# Altium PCB NZS_A4954_Rx.PcbDoc (part 1 of 2)
Units mil, origin at the board's own origin, x right, y up, seen from the top; angles counter-clockwise.
Board outline 1653.54 x 1653.54 mil, 2 copper layers (Top Layer, Bottom Layer), stack 61.2 mil thick; 79 components, 75 nets, 289 pads, 145 vias.
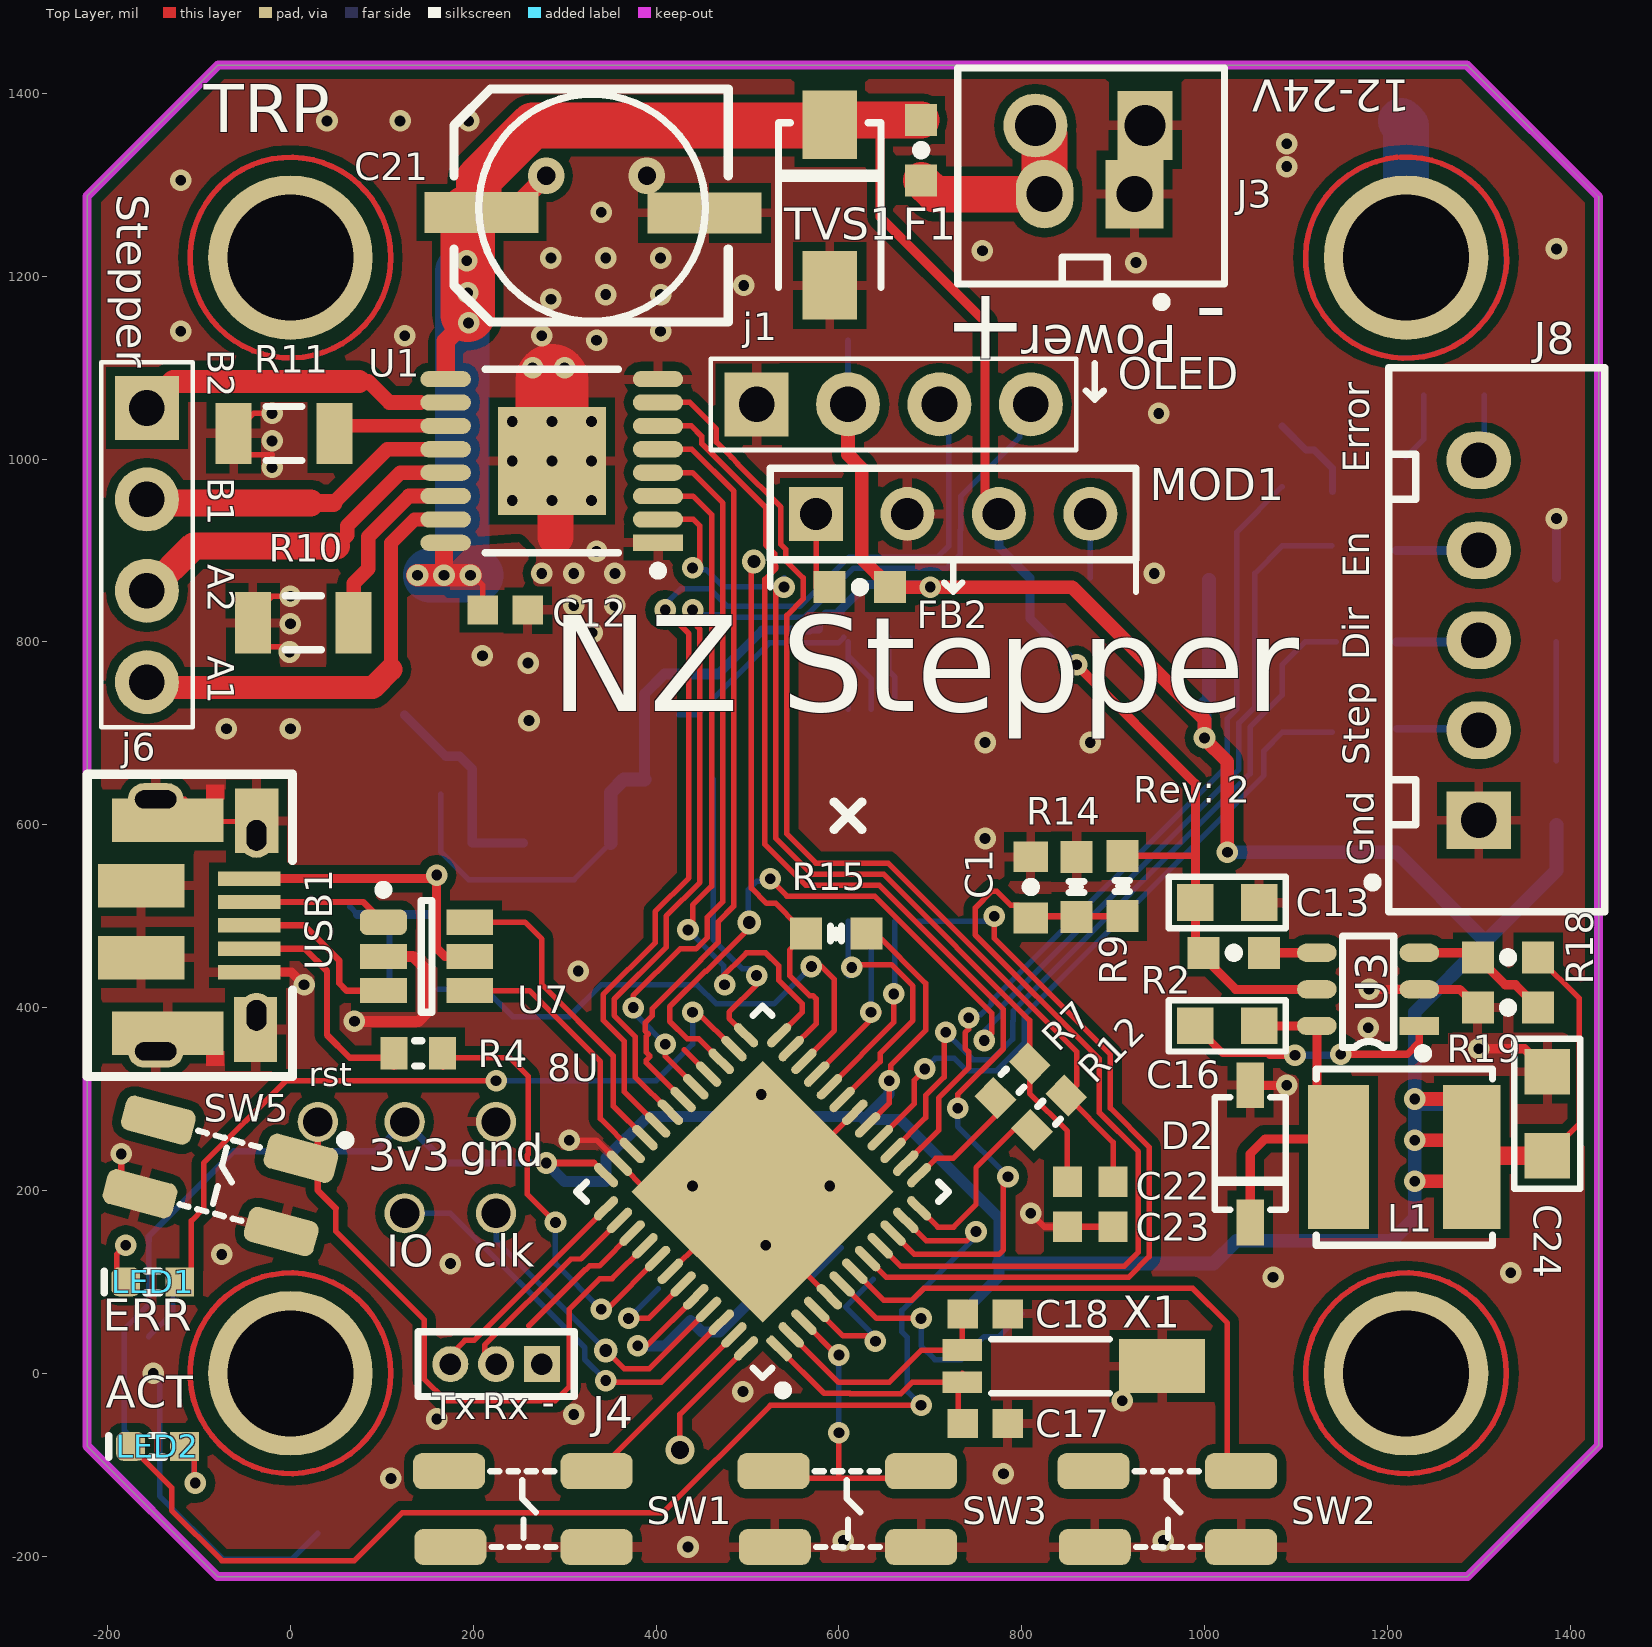
[diagram p0: Top Layer view]
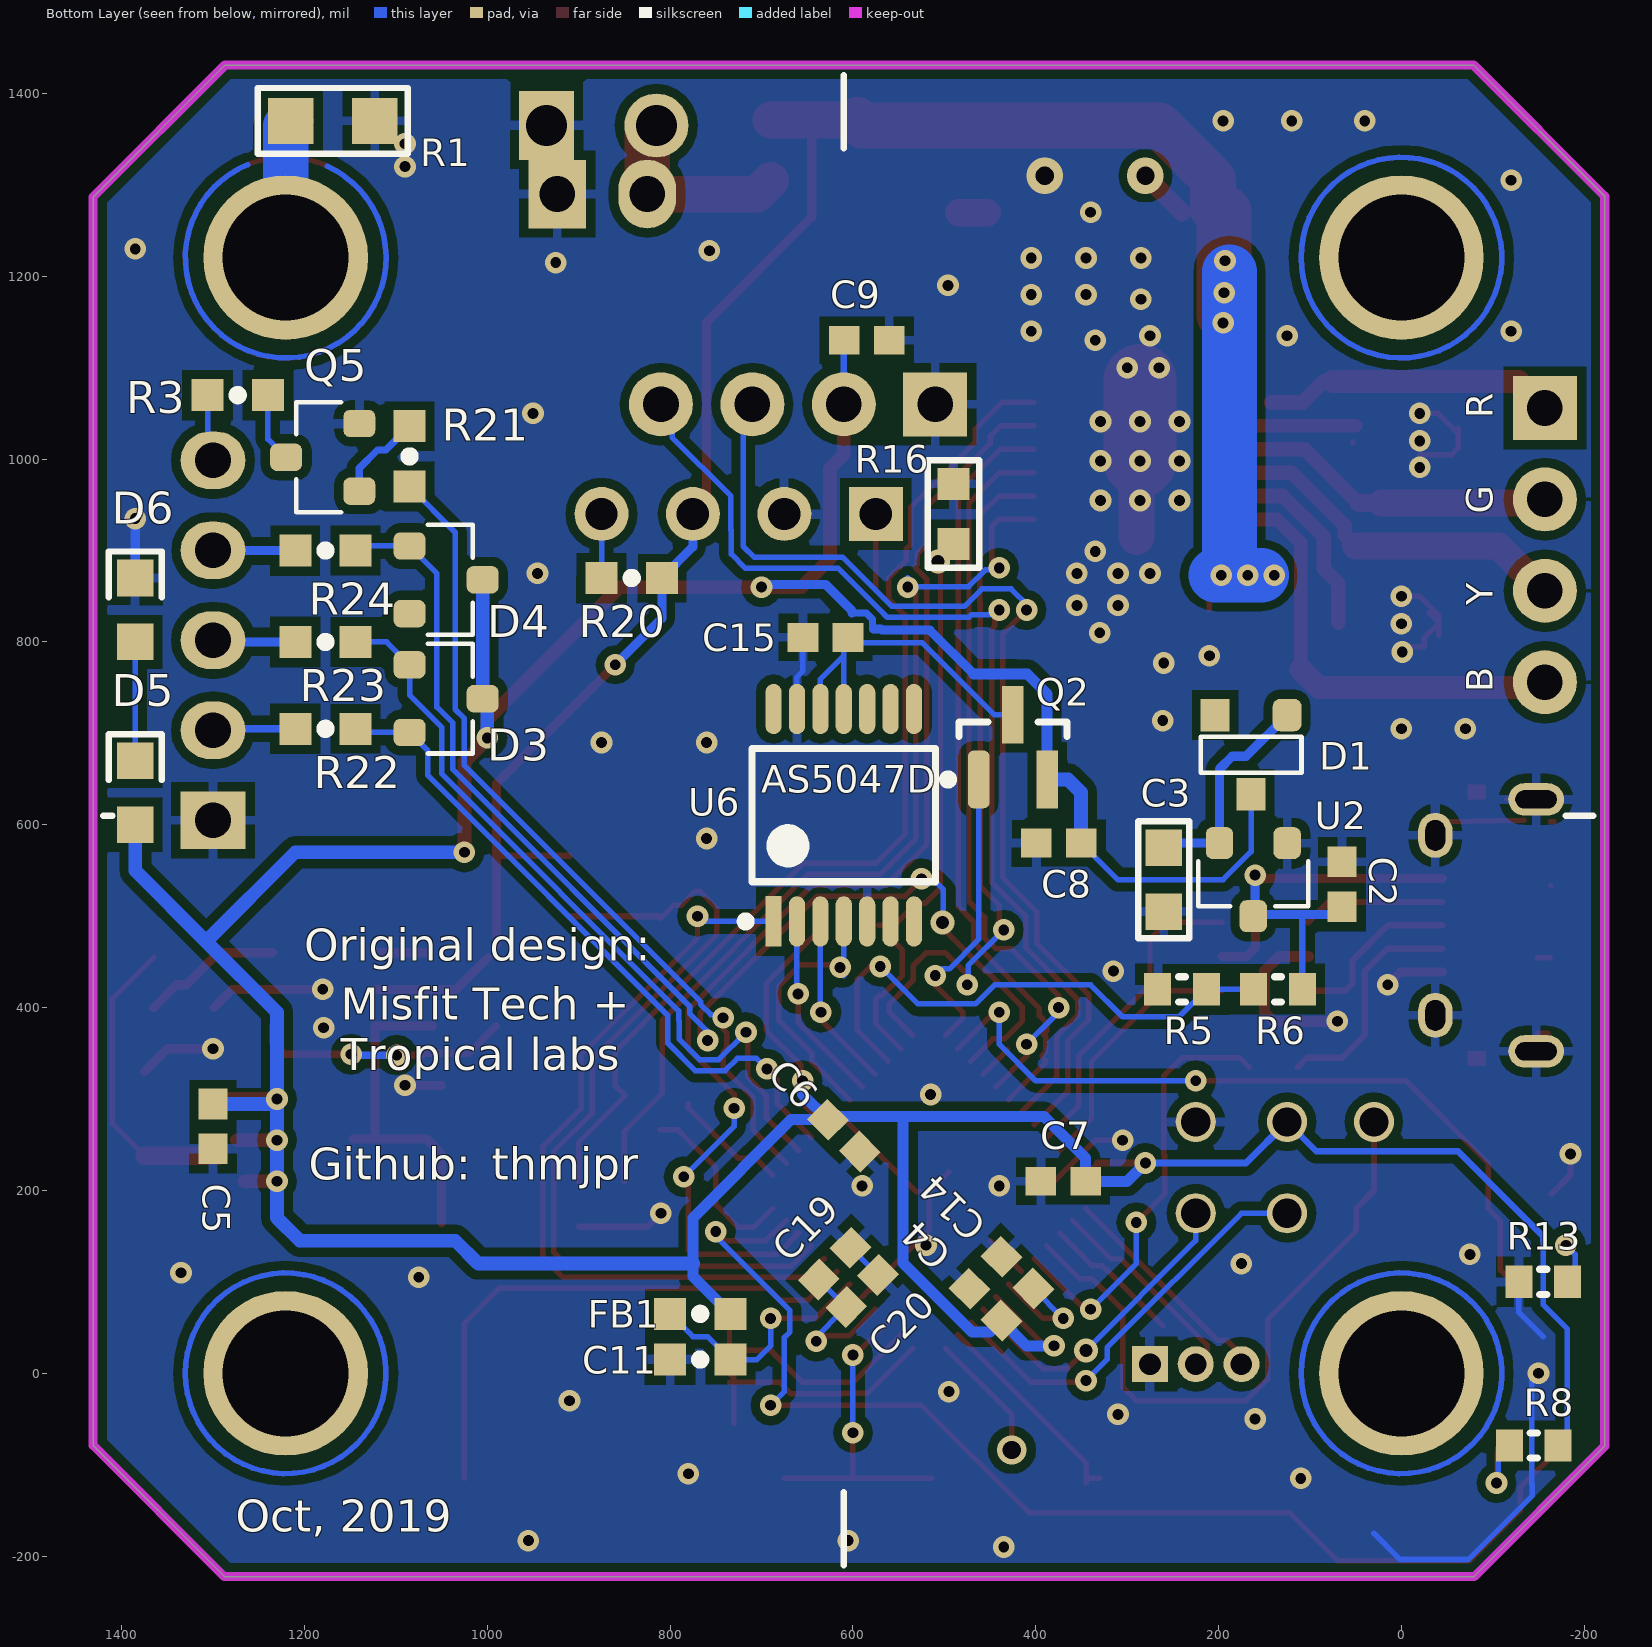
[diagram p1: Bottom Layer view, seen from below]
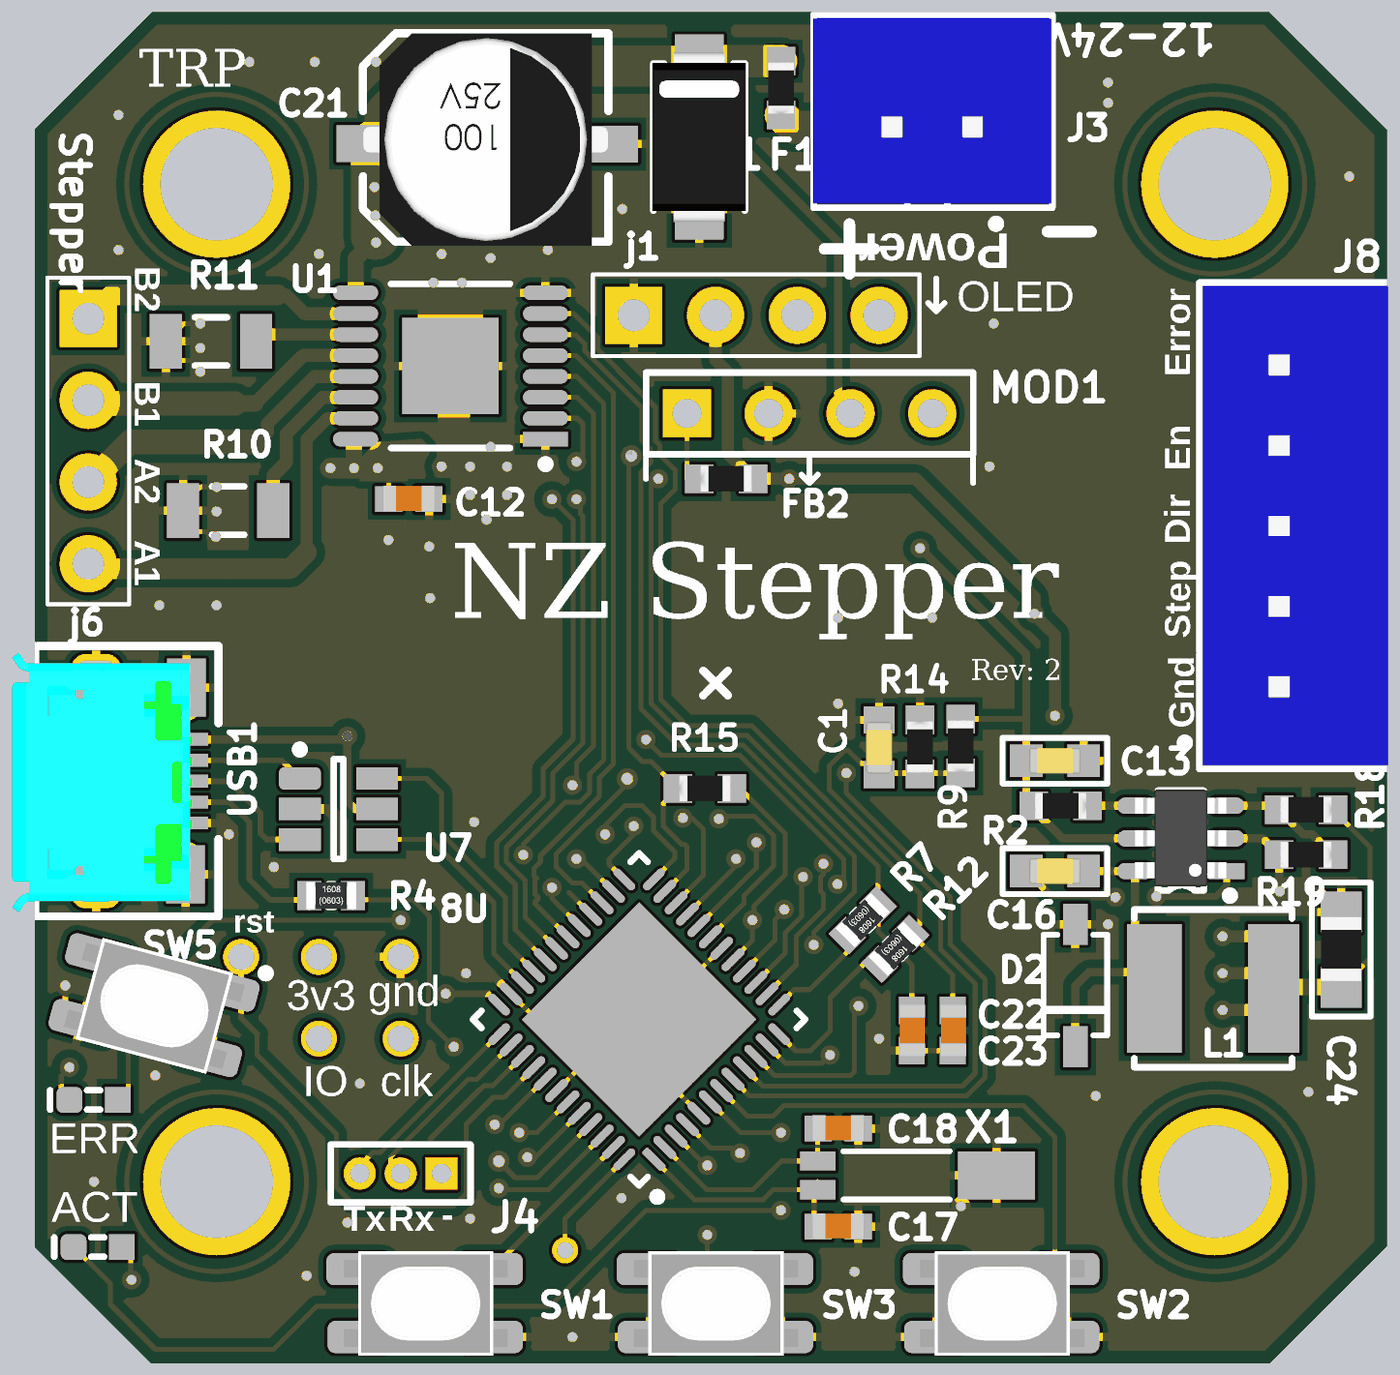
[diagram p2: 3D render of the assembled board from above, using the file's embedded part models]
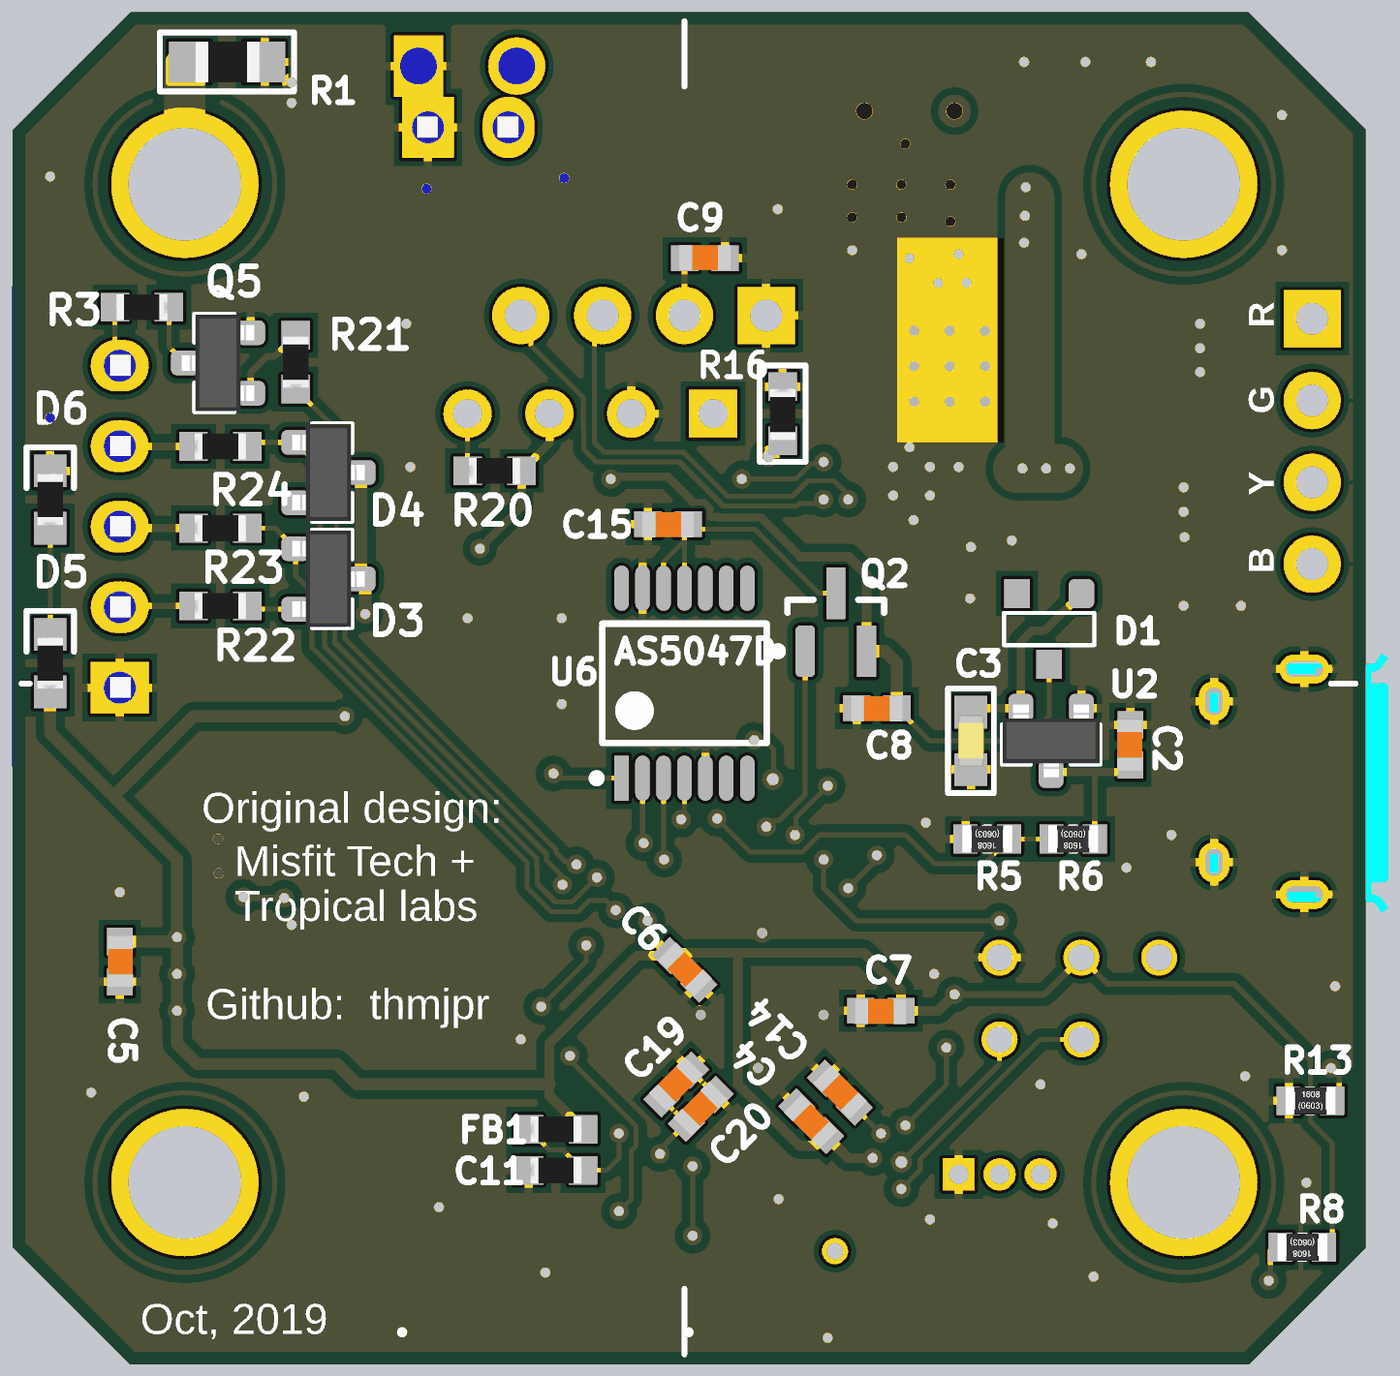
[diagram p3: 3D render of the assembled board from below, using the file's embedded part models]

## Layer stack, top to bottom
Top Solder: solder mask 0.4, Solder Resist, Dk 3.5
Top Layer: signal copper 1.4
Dielectric 1: dielectric 58.4, FR-4, Dk 4.8
Bottom Layer: signal copper 1.4
Bottom Solder: solder mask 0.4, Solder Resist, Dk 3.5

## Board outline
-79.56,-222.44 -222.44,-79.56 -222.44,1287.56 -78.9,1431.1 1286.9,1431.1 1431.1,1286.9 1431.1,-78.9 1287.56,-222.44

## Design rules (kind name [scope] priority, off if disabled: settings)
Clearance Vmotor [InNet('VMOT')] p1: gap=9 ignorepadtopadclearanceinfootprint=TRUE
Clearance poly [InPolygon] p2: gap=10 ignorepadtopadclearanceinfootprint=FALSE
Clearance [All] p3: gap=6 ignorepadtopadclearanceinfootprint=FALSE except(0: Arc-Hole Track-Hole SMDPad-Hole THPad-Hole Via-Hole Fill-Hole Poly-Hole Region-Hole Text-Hole)
HoleSize [All] p1: absolutevalues=TRUE maxlimit=393.7 minlimit=11.81 maxpercent=80.000 minpercent=20.000
MinimumAnnularRing [All] p1: minimumring=5.91
MinimumSolderMaskSliver [All] p1: minsoldermaskwidth=1
PolygonConnect isvia [isvia] p1: connectstyle=Direct reliefconductorwidth=10 reliefentries=4 polygonreliefangle="90 Angle" airgapwidth=10
PolygonConnect PolygonConnect_4 [All vs IsNamedPolygon('vmot')] p2: connectstyle=Direct reliefconductorwidth=10 reliefentries=4 polygonreliefangle="90 Angle" airgapwidth=10
PolygonConnect PolygonConnect_2 [All vs IsNamedPolygon('NETJ6-4')] p3: connectstyle=Direct reliefconductorwidth=10 reliefentries=4 polygonreliefangle="90 Angle" airgapwidth=10
PolygonConnect PolygonConnect_1 [All vs IsNamedPolygon('NETJ6-4')] p4: connectstyle=Relief reliefconductorwidth=10 reliefentries=4 polygonreliefangle="90 Angle" airgapwidth=10
PolygonConnect [All] p5: connectstyle=Relief reliefconductorwidth=10 reliefentries=4 polygonreliefangle="90 Angle" airgapwidth=10
RoutingVias [All] p1: holewidth=11.81 width=23.62 viastyle="Through Hole" minholewidth=11.81 minwidth=23.62 maxholewidth=28 maxwidth=50
SilkToSilkClearance [All] p1: silktosilkclearance=0
SilkToSolderMaskClearance [IsPad] p1: minsilkscreentomaskgap=1 clearancetoexposedcopper=TRUE
SolderMaskExpansion [All] p1: expansion=4
Width [All] p1: maxlimit=200 minlimit=6 preferedwidth=8 minimp=50.000000 maximp=50.000000 favimp=50.000000
26 further rules are at their usual default settings.

## Components (designator, comment, footprint, x,y, rotation, side; value= is the part's Value field where it differs from the comment)
C1 "CAP-NP" "0603_CAP_no overlay" 810,565 r270 top
C2 "4.7uF" CAP_0603_H 65,535 r90 bottom
C3 "CAP-NP" 0603_cap 260,575 r270 bottom
C4 "0.1uF" CAP_0603_H 455,75 r45 bottom
C5 "4.7uF" CAP_0603_H 1300,270 r270 bottom
C6 "0.1uF" CAP_0603_H 610,260 r225 bottom
C7 "0.1uF" CAP_0603_H 370,210 r0 bottom
C8 "0.1uF" CAP_0603_H 375,580 r0 bottom
C9 "0.1uF" CAP_0603_H 585,1130 r180 bottom
C11 "CAP-NP" "0603 - no overlay" 800,15 r180 bottom
C12 "0.22uF" CAP_0603_H 235,835 r0 top
C13 "CAP-NP" 0603_cap 990,515 r0 top
C14 "1uF" CAP_0603_H 420,110 r225 bottom
C15 "0.1uF" CAP_0603_H 630,805 r0 bottom
C16 "CAP-NP" 0603_cap 1060,380 r180 top
C17 "10pF" CAP_0603_H 760,-55 r0 top
C18 "10pF" CAP_0603_H 760,65 r0 top
C19 "4.7uF" CAP_0603_H 620,120 r135 bottom
C20 "0.1uF" CAP_0603_H 590,90 r135 bottom
C21 "100uF" UWT1V101MCL1GS 329,1270 r0 top
C22 "0.1uF" CAP_0603_H 850,185 r270 top
C23 "0.1uF" CAP_0603_H 900,185 r270 top
C24 "CAP-NP" 0805 1375,330 r270 top
D1 "BAT-64-05W-E6327" BAT-64-05W-E6327 125,720 r270 bottom
D2 "x" SOD-123 1050,315 r270 top
D3 "04-060002-008" SOT-23 1085,775 r270 bottom
D4 "04-060002-008" SOT-23 1085,905 r270 bottom
D5 "04-060001-011" 0603_diode 1385,600 r90 bottom
D6 "04-060001-011" 0603_diode 1385,800 r90 bottom
F1 "FUSE_SRF" "0603 - no overlay" 690,1305 r90 top
FB1 "IND" "0603 - no overlay" 800,65 r180 bottom
FB2 "IND" "0603 - no overlay" 590,860 r0 top
j1 "4_pin_100mils" 4_pin_100mils 810,1060 r90 top
J3 "JST_XH_Male_2" JST_B2B_XH_A 825,1290 r0 top
J4 "MHDR1X3" MHDR1X3 275,10 r180 top
j6 "4_pin_100mils" 4_pin_100mils -157,756 r0 top
J8 "JST_XH_Male_5" JST_B5B_XH_A 1300,605 r270 top
L1 "NR5040" NR5040 1315,140 r90 top
LED1 "LTST-C190KRKT" LTST-C190KRKT -180,100 r0 top
LED2 "LTST-C190KSKT" LTST-C190KSKT -175,-80 r0 top
MOD1 "Header 4" HDR1X4 575,940 r0 top
Q2 "IRLML6401TRPBF" IRLML6401TRPBF_M 425,685 r90 bottom
Q5 "TRANS-BJT-NPN" SOT-23 1140,965 r90 bottom
R1 "RES" 0805 1123,1370 r0 bottom
R2 "RES" "0603 - no overlay" 1065,460 r180 top
R3 "RES" "0603 - no overlay" 1240,1070 r0 bottom
R4 "330" RES_0603_H 140,350 r180 top
R5 "10K" RES_0603_H 240,420 r180 bottom
R6 "5.1K" RES_0603_H 135,420 r180 bottom
R7 "1K" RES_0603_H 790,320 r45 top
R8 "1K" RES_0603_H -145,-79 r180 bottom
R9 "RES" 0603_res_no_overlay 910,500 r90 top
R10 "0.1" RES_1206_H 14,821 r180 top value=0.2
R11 "0.1" RES_1206_H -7,1028 r180 top value=0.2
R12 "1K" RES_0603_H 830,285 r45 top
R13 "1K" RES_0603_H -155,100 r0 bottom
R14 "RES" 0603_res_no_overlay 860,565 r270 top
R15 "RES" 0603_res_no_overlay 564,481 r0 top
R16 "RES-NTC" 0603_res 490,973 r270 bottom
R18 "RES" "0603 - no overlay" 1365,455 r180 top
R19 "RES" "0603 - no overlay" 1365,400 r180 top
R20 "RES" "0603 - no overlay" 875,870 r180 bottom
R21 "RES" "0603 - no overlay" 1085,970 r90 bottom
R22 "RES" "0603 - no overlay" 1210,705 r180 bottom
R23 "RES" "0603 - no overlay" 1210,800 r180 bottom
R24 "RES" "0603 - no overlay" 1210,900 r180 bottom
SW1 "SW-PB-SPST_small" SW-PB-K2-1808SN-A4SW 173.58,-107.01 r0 top
SW2 "SW-PB-SPST_small" SW-PB-K2-1808SN-A4SW 878.58,-107.01 r0 top
SW3 "SW-PB-SPST_small" SW-PB-K2-1808SN-A4SW 528.58,-107.01 r0 top
SW5 "SW-PB-SPST_small" SW-PB-K2-1808SN-A4SW -144.44,276.94 r345 top
TVS1 "F6827CT-ND" SMA 590,1190 r90 top
U1 "A4954" A4954 286,998 r180 top locked
U2 "IC-MCP1700" SOT-23 125,580 r0 bottom
U3 "AOZ1280" SOT23-6L 1235,380 r180 top
U6 "AS5047D" AS5047D 610,610.47 r90 bottom locked
U7 "USBLC6-2" USBLC6-2SC6 149,456 r0 top
U8 "ATSAMD21G18A-MF" ATSAMD21G18A-MF 516.56,198.56 r135 top locked
USB1 "10118194-0001LF" 10118194-0001LF -45,490 r270 top
X1 "32.768kHz" AB26TRQ 735,-10 r180 top

## Footprints (in the part's own frame and the unit in brackets; to place one, negate y for a bottom-side part, rotate by r counter-clockwise, add the part's x,y. Pads: shape width x height; smd on the part's side, far side on the other; paste and mask are expansions set on the pad)
4_pin_100mils [mil]
  rect 70x70 hole 39: 1(0,300)
  round 70 hole 39: 2(0,200) 3(0,100) 4(0,0)
  silkscreen extent -50,-49 50,350
"0603 - no overlay" [mil]
  rect 35x35 smd: 1(0,0) 2(66,0)
  silkscreen extent 28,-5 38,5, body extent 2,-16 64,16, height 18
0603_cap [mil]
  rect 40x40 smd: 1(0,0) 2(70,0)
  silkscreen extent -29,-28 99,28, body extent 4,-16 67,16, height 31
"0603_CAP_no overlay" [mil]
  rect 33.46x38 smd: 1(0,0) 2(67,0)
  silkscreen extent 28,-5 38,5, body extent 3,-16 66,16, height 31
0603_diode [mil]
  rect 40x40 smd: A(0,0) K(70,0)
  silkscreen extent 49,-29 99,29, body extent 4,-16 66,16, height 18
0603_res [mil]
  rect 35x35 smd: 1(0,0) 2(66,0)
  silkscreen extent -26,-28 92,28, body extent 3,-16 65,16, height 18
0603_res_no_overlay [mil]
  rect 35x35 smd: 1(0,0) 2(66,0)
  silkscreen extent 27,-8 39,8, body extent 2,-16 65,16, height 18
0805 [mil]
  rect 50x50 smd: 1(0,0) 2(92,0)
  silkscreen extent -36,-36 128,36, body extent 6,-25 85,25, height 20
10118194-0001LF [mm]
  rect 0.4x1.75 smd: 1(-1.3,0) 2(-0.65,0) 3(0,0) 4(0.65,0) 5(1.3,0)
  oval 0.9x1.55 hole 0.5 slot 1.15 at 90 deg: 6(-3.5,-2.6) 6(3.5,-2.6)
  rect 1.2x3.1 smd: 6(-2.921,-2.261) 6(2.997,-2.261)
  rect 1.8x1.2 smd: 6(-2.906,0.206) 6(2.896,0.178)
  oval 1.25x0.95 hole 0.55 slot 0.85 at 0 deg: 6(-2.5,0.2) 6(2.5,0.2)
  rect 1.2x2.4 smd: 6(-1.1,-3) 6(0.9,-3)
  Top Layer region: 3.5,-0.7 3.9,-0.7 3.9,-1.2 3.5,-1.2
  Top Layer region: -3.9,-0.7 -3.5,-0.7 -3.5,-1.2 -3.9,-1.2
  silkscreen extent -4.2,-4.5 4.2,1.2, body extent -3.99,-5.21 4.06,0.37, height 2.78
A4954 [mm] "TSOP, 16-Leads, Body 5.50x4.40mm, Pitch 0.65mm, Thermal Pad 3.00x3.00mm, IPC Medium Density"
  rect 1.4x0.45 smd: 1(-2.95,2.275)
  oval 1.4x0.45 smd: 2(-2.95,1.625) 3(-2.95,0.975) 4(-2.95,0.325) 5(-2.95,-0.325) 6(-2.95,-0.975) 7(-2.95,-1.625) 8(-2.95,-2.275) 9(2.95,-2.275) 10(2.95,-1.625) 11(2.95,-0.975) 12(2.95,-0.325) 13(2.95,0.325) 14(2.95,0.975) 15(2.95,1.625) 16(2.95,2.275)
  rect 3x3 smd: 17(0,0)
  silkscreen extent -3.08,-2.55 1.85,3.17, body extent -2.25,-2.55 2.25,2.55, height 1.2
AB26TRQ [mm] "Surface mount crystal, cylindrical"
  rect 1.1x0.6 smd: 1(0,0) 2(0,-0.9)
  rect 2.4x1.5 smd: 3(-5.55,-0.45)
  silkscreen extent -4.1,-1.2 -0.8,0.3, body extent -6.1,-1.2 -0.9,0.3, height 1.48
AS5047D [mm] "TSOP, 14-Leads, Body 5.00x4.40mm, Pitch 0.65mm, IPC Medium Density"
  rect 1.4x0.45 smd: 1(-2.95,1.95)
  oval 1.4x0.45 smd: 2(-2.95,1.3) 3(-2.95,0.65) 4(-2.95,0) 5(-2.95,-0.65) 6(-2.95,-1.3) 7(-2.95,-1.95) 8(2.95,-1.95) 9(2.95,-1.3) 10(2.95,-0.65) 11(2.95,0) 12(2.95,0.65) 13(2.95,1.3) 14(2.95,1.95)
  silkscreen extent -3.07,-2.55 1.85,2.85, body extent -2.25,-2.55 2.25,2.55, height 1.2
ATSAMD21G18A-MF [mm] "QFN, 48-Leads, Body 7.00x7.00mm, Pitch 0.50mm, Thermal Pad 5.15x5.15mm, IPC Medium Density"
  rrect50% 0.85x0.25 smd: 1(-3.4,2.75)
  oval 0.9x0.25 smd: 2(-3.375,2.25) 3(-3.375,1.75) 4(-3.375,1.25) 5(-3.375,0.75) 6(-3.375,0.25) 7(-3.375,-0.25) 8(-3.375,-0.75) 9(-3.375,-1.25) 10(-3.375,-1.75) 11(-3.375,-2.25) 26(3.375,-2.25) 27(3.375,-1.75) 28(3.375,-1.25) 29(3.375,-0.75) 30(3.375,-0.25) 31(3.375,0.25) 32(3.375,0.75) 33(3.375,1.25) 34(3.375,1.75) 35(3.375,2.25)
  oval 0.85x0.25 smd: 12(-3.4,-2.75) 25(3.4,-2.75) 36(3.4,2.75)
  oval 0.25x0.85 smd: 13(-2.75,-3.4) 24(2.75,-3.4) 37(2.75,3.4) 48(-2.75,3.4)
  oval 0.25x0.9 smd: 14(-2.25,-3.375) 15(-1.75,-3.375) 16(-1.25,-3.375) 17(-0.75,-3.375) 18(-0.25,-3.375) 19(0.25,-3.375) 20(0.75,-3.375) 21(1.25,-3.375) 22(1.75,-3.375) 23(2.25,-3.375) 38(2.25,3.375) 39(1.75,3.375) 40(1.25,3.375) 41(0.75,3.375) 42(0.25,3.375) 43(-0.25,3.375) 44(-0.75,3.375) 45(-1.25,3.375) 46(-1.75,3.375) 47(-2.25,3.375)
  rect 5.15x5.15 smd: 35(0,0)
  silkscreen extent -4.42,-3.65 3.65,3.65, body extent -3.5,-3.5 3.5,3.5, height 0.9
BAT-64-05W-E6327 [mm] "SOT23, 3-Leads, Body 3.0x2.5mm (max), Pitch 0.95mm, IPC High Density"
  rrect50% 0.9x0.8 smd: 1(0,0)
  rect 0.9x0.8 smd: 2(0,-2) 3(2.2,-1)
  silkscreen extent 0.6,-2.4 1.6,0.4
CAP_0603_H [mm] "Chip Capacitor, 2-Leads, Body 1.6x0.8mm, IPC High Density"
  rect 0.85x0.8 smd: 1(-0.625,0) 2(0.625,0)
  body extent -0.8,-0.38 0.8,0.42, height 0.5
HDR1X4 [mm] "Connector; Header; 4 Position"
  rect 1.5x1.5 hole 0.9: 1(0,0)
  round 1.5 hole 0.9: 2(2.54,0) 3(5.08,0) 4(7.62,0)
  silkscreen extent -1.27,-1.27 8.89,1.27
IRLML6401TRPBF_M [mm] "SOT23, 3-Leads, Body 3.0x2.6mm (max), Pitch 0.95mm, IPC Medium Density"
  rrect50% 1.6x0.6 smd: 1(-0.9,0.95)
  rect 1.6x0.6 smd: 2(-0.9,-0.95) 3(0.9,0)
  silkscreen extent -1.02,-1.5 0.7,1.93, body extent -0.7,-1.52 0.7,1.52, height 1.12
JST_B2B_XH_A [mm]
  rect 1.6x1.905 hole 0.991: 1(2.5,0)
  oval 1.6x1.905 hole 0.991: 2(0,0)
  silkscreen extent -2.41,-3.13 5,3.5, body extent -2.43,-2.37 4.97,3.38, height 7
JST_B5B_XH_A [mm] "5 pin vertical"
  rect 1.6x1.8 hole 0.991: 1(0,0)
  oval 1.6x1.8 hole 0.991: 2(-2.5,0) 3(-5,0) 4(-7.5,0) 5(-10,0)
  silkscreen extent -12.57,-3.08 2.54,3.5, body extent -12.46,-2.4 2.44,3.35, height 7
LTST-C190KRKT [mm] "Chip Capacitor, 2-Leads, Body 1.6x0.8mm, IPC High Density"
  rect 0.8x0.8 smd: A(1.5,0)
  rrect50% 0.8x0.8 smd: K(0,0)
  silkscreen extent -0.6,-0.3 0.95,0.3, body extent -0.05,-0.4 1.55,0.4, height 0.8
LTST-C190KSKT [mm] "Chip Capacitor, 2-Leads, Body 1.6x0.8mm, IPC High Density"
  rect 0.8x0.8 smd: A(1.5,0)
  rrect50% 0.8x0.8 smd: K(0,0)
  silkscreen extent -0.6,-0.3 0.95,0.3, body extent -0.05,-0.4 1.55,0.4, height 0.8
MHDR1X3 [mm] "Connector; Header; 3 Position"
  rect 1x1 hole 0.6: 1(0,0)
  round 1 hole 0.6: 2(1.27,0) 3(2.54,0)
  silkscreen extent -0.9,-0.9 3.44,0.9
NR5040 [mm] "4.9x4.9mm inductor"
  rect 4x1.7 smd: 1(2.45,4.275)
  rect 4x1.6 smd: 2(2.45,0.575)
  silkscreen extent 0,0 4.9,4.9, body extent 0,0 4.9,4.9, height 4
RES_0603_H [mm] "Chip Resistor, 2-Leads, Body 1.6x0.8mm, IPC High Density"
  rect 0.75x0.9 smd: 1(-0.675,0) 2(0.675,0)
  silkscreen extent -0.1,-0.35 0.1,0.35, body extent -0.78,-0.42 0.77,0.43, height 0.45
RES_1206_H [mm] "Chip Resistor, 2-Leads, Body 3.1x1.6mm, IPC High Density"
  rect 1x1.7 smd: 1(-1.4,0) 2(1.4,0)
  silkscreen extent -0.5,-0.75 0.5,0.75, body extent -1.65,-0.87 1.65,0.88, height 0.6
SMA [mil]
  rect 75x60 smd: A(0,0) K(176,0)
  silkscreen extent -2,-56 178,56, body extent -16,-57 192,57, height 95
SOD-123 [mil]
  rect 50x30 smd: A(0,0) K(150,0)
  silkscreen extent 13,-39 136,39, body extent -5,-38 155,38, height 45
SOT23-6L [mil]
  rect 43.31x20 smd: 1(0,0)
  oval 43.31x20 smd: 2(0,-40) 3(0,-80) 4(112.13,-80) 5(112.13,-40) 6(112.13,0)
  silkscreen extent -9,-98 84,35, body extent 0,-99 112,19, height 47
SOT-23 [mil]
  rrect50% 30x35 smd: 1(0,0) 2(74,0) 3(37,80)
  silkscreen extent -23,20 97,69, body extent -22,-4 96,84, height 47
SW-PB-K2-1808SN-A4SW [mm] "4.2x3.3x2.5mm tactile SMD switch"
  rrect50% 2x1 smd: 1(0,0) 2(4.1,0) 3(0.036,-2.108) 4(4.1,-2.108)
  silkscreen extent 1.14,-2.11 2.96,0, body extent -0.47,-2.69 4.63,0.56, height 2.4
USBLC6-2SC6 [mm] "SOT23, 6-Leads, Body 2.9x1.6mm, Pitch 0.95mm, Lead Span 2.7mm, IPC Low Density"
  rrect50% 1.3x0.7 smd: 1(-1.2,0.95)
  rect 1.3x0.7 smd: 2(-1.2,0) 3(-1.2,-0.95) 4(1.2,-0.95) 5(1.2,0) 6(1.2,0.95)
  silkscreen extent -1.32,-1.55 0.15,1.97, body extent -0.9,-1.55 0.9,1.55, height 1.45
UWT1V101MCL1GS [mil]
  rect 125x45 smd: 1(-120,0) 2(124,-0.57)
  silkscreen extent -150,-120 150,135, body extent -150,-125 150,135, height 315

## Part data
C1: "CAP, XXX, 50V, NPO, Ceramic, 0603", Manufacturer=?, Manufacturer Part Number=?, Sch-Display="1nF, 50V", Vendor=Digi-Key, Vendor Part Number=?
C2 C5 C19: library part altiumdb4ee8d107ce20d3.65865655, "CAP 0603 CER 4.7UF 6.3V X5R 10%", Current_Str=A, Manufacture_Parts="Panasonic - ECG:ECJ-1VB0J475K / Kemet:C0603C475K9PACTU / Taiyo Yuden:JMK107BJ475KA-T", Manufacturer="Taiyo Yuden", Manufacturer_Part_Number=JMK107BJ475KA-T, Misfit Part Number=00014-001-06202, Operating_Temp="-55°C ~ 85°C", Temp_Coeff=X5R, Tolerance=10%, Voltage=6.3, Voltage_Str=6.3V, Company_Part_GUID=altiumdb4ee8d107ce20d3.65865655, Component=ECJ-1VB0J475K, ComponentLink1Description=Digikey, ComponentLink1URL=http://search.digikey.com/us/en/products/JMK107BJ475KA-T/587-1785-1-ND/1212801, ComponentLink2Description=Datasheet, ComponentLink2URL=http://media.digikey.com/pdf/Data%20Sheets/Panasonic%20Capacitors%20PDFs/ECJ(HighCapacitance).pdf, Created_Date=12/14/2011, Farad=4.7E-6, ID=52, Misfit Price=0, Price=0, Size="0603 (1608 Metric)", Size_Imperial=0603, Size_Metric=1608, Vendor=Digikey, Vendor_Packaging="Cut Tape (CT)", Vendor_Part_GUID=altiumdb4ee8d10c43eca0.93978749, Vendor_Part_Number=587-1785-1-ND, Vendor_Part_URL=http://search.digikey.com/us/en/products/JMK107BJ475KA-T/587-1785-1-ND/1212801, Vendor_Qty_Avail=425818, Vendor_Unit_Price=0.27, Vendor_Update_Date=4/26/2012, Watts_Str=W
C3 C13 C16: "CAP, XXX, 50V, NPO, Ceramic, 0603", Manufacturer=Generic, Manufacturer Part Number="10%, 50V, X5R", Vendor=Digi-Key
  C3: Sch-Display=2uF
  C13 C16: Sch-Display=0.1uF
C4 C6 C7 C8 C9 C12 C15 C20 C22 C23: library part altiumdb529bf947b98393.42967747, "CAP CER 0.1UF 50V Y5V 0603", Current_Str=A, Manufacture_Parts="Samsung Electro-Mechanics America, Inc:CL10F104ZB8NNNC", Manufacturer="Samsung Electro-Mechanics America, Inc", Manufacturer_Part_Number=CL10F104ZB8NNNC, Operating_Temp="-30°C ~ 85°C", Temp_Coeff="Y5V (F)", Tolerance="-20%, +80%", Voltage=50, Voltage_Str=50V, Company_Part_GUID=altiumdb529bf947b98393.42967747, Component=CL10F104ZB8NNNC, ComponentLink1Description=Digikey, ComponentLink1URL=http://www.digikey.com/product-detail/en/CL10F104ZB8NNNC/1276-1012-2-ND/3886670, ComponentLink2Description=Datasheet, ComponentLink2URL=http://www.samsungsem.com/servlet/FileDownload?type=spec&amp;file=CL10F104ZB8NNNC.pdf, Created_Date=12/1/2013, Farad=1E-7, High_Price=0.0032, ID=68, Low_Price=0.00191, Misfit Price=0, Price=0.00191, Size="0603 (1608 Metric)", Size_Imperial=0603, Size_Metric=1608, Vendor=Digikey, Vendor_Part_Number=1276-1012-2-ND, Vendor_Part_URL=http://www.digikey.com/product-detail/en/CL10F104ZB8NNNC/1276-1012-2-ND/3886670, Vendor_Qty_Avail=0, Vendor_Update_Date=12/1/2013, Watts=0, Watts_Str=0W
C11 C24: "CAP, XXX, 50V, NPO, Ceramic, 0603", Manufacturer=Generic, Manufacturer Part Number="10%, 25V, X5R", Vendor=Digi-Key
  C11: Sch-Display=1u
  C24: Sch-Display="10u, 25V"
C14: library part altiumdb4ee8b0b72ecfe9.85374024, "CAP 0603 CER 1UF 10V X5R 10%", Current_Str=A, Manufacture_Parts="Kemet:C0603C105K8PACTU / Panasonic - ECG:ECJ-1VB1A105K / AVX:0603ZD105KAT2A / Murata:GRM188R61A105KA61D", Manufacturer=Kemet, Manufacturer_Part_Number=C0603C105K8PACTU, Misfit Part Number=00012-001-06143, Operating_Temp="- 55 C to + 85 C", Temp_Coeff=X5R, Tolerance="10 %", Voltage=10, Voltage_Str=10V, Company_Part_GUID=altiumdb4ee8b0b72ecfe9.85374024, Component=C0603C105K8PACTU, ComponentLink1Description=Mouser, ComponentLink1URL=http://search.digikey.com/us/en/products/C0603C105K8PACTU/399-3118-1-ND/551623, ComponentLink2Description=Datasheet, ComponentLink2URL=http://www.kemet.com/datasheets&C0603C105K8PACTU, Created_Date=12/14/2011, Farad=1E-6, High_Price=0.19, ID=24, Low_Price=0.005, Misfit Price=0, Price=0.005, Size="0603 (1608 metric)", Size_Imperial=0603, Size_Metric=1608, Vendor=Digikey, Vendor_Part_Number=399-3118-1-ND, Vendor_Part_URL=http://search.digikey.com/us/en/products/C0603C105K8PACTU/399-3118-1-ND/551623, Vendor_Qty_Avail=793329, Vendor_Unit_Price=0.07, Vendor_Update_Date=4/26/2012, Watts_Str=W
C17 C18: library part altiumdb4ee8b063d08416.68377278, "CAP 0603 CER 10PF 50V C0G 5%", Current_Str=A, Manufacture_Parts="AVX:06035A100JAT2A / Kemet:C0603C100J5GACTU / Murata:GRM1885C1H100JA01D / Yageo:CC0603JRNPO9BN100", Manufacturer=Kemet, Manufacturer_Part_Number=C0603C100J5GACTU, Old Part Number=5110-0289-00, Operating_Temp="- 55 C to + 125 C", Temp_Coeff="C0G (NP0)", Tolerance="5 %", Voltage=50, Voltage_Str=50V, Company_Part_GUID=altiumdb4ee8b063d08416.68377278, Component=06035A100JAT2A, ComponentLink1Description=Mouser, ComponentLink1URL=http://search.digikey.com/us/en/products/C0603C100J5GACTU/399-1049-1-ND/411324, ComponentLink2Description=Datasheet, ComponentLink2URL=http://www.avx.com/docs/Catalogs/ccog.pdf, Created_Date=12/14/2011, Farad=1E-11, High_Price=0.1, ID=15, Low_Price=0.014, Misfit Price=0, Price=0.014, Size="0603 (1608 metric)", Size_Imperial=0603, Size_Metric=1608, Vendor=Digikey, Vendor_Part_Number=399-1049-1-ND, Vendor_Part_URL=http://search.digikey.com/us/en/products/C0603C100J5GACTU/399-1049-1-ND/411324, Vendor_Qty_Avail=563976, Vendor_Unit_Price=0.04, Vendor_Update_Date=4/26/2012, Watts_Str=W
C21: library part altiumdb57a880e8344183.38641875, "100uF 35V SMD", Current_Str=A, Manufacture_Parts=:UWT1V101MCL1GS, Manufacturer_Part_Number=UWT1V101MCL1GS, Tolerance=20%, Voltage=35V, Company_Part_GUID=altiumdb57a880e8344183.38641875, Component=865080545012, ComponentLink1Description=unknown, ComponentLink2Description=Datasheet, Farad=0, ID=15, Misfit Price=0, Price=0, Size="6.3 x 7.7mm", Size_Imperial="6.3 x 7.7mm", Size_Metric="6.3 x 7.7mm", Vendor=unknown, Voltage_Str=35V, Watts=0, Watts_Str=0W
D1: library part altiumdb4f1b209379f822.22085624, "DIODE SCHOTTKY 40V SOT-323 250mA", Current_Str=A, Manufacture_Parts="Infineon Technologies:BAT 64-05W H6327 / Infineon Technologies:BAT 64-05W E6327", Manufacturer="Infineon Technologies", Manufacturer_Part_Number="BAT 64-05W H6327", Misfit Part Number=00013-203-00104, Voltage=0, Voltage_Str=0V, Company_Part_GUID=altiumdb4f1b209379f822.22085624, Component="BAT 64-05W H6327", ComponentLink1Description=Digikey, ComponentLink1URL=http://www.digikey.com/product-detail/en/BAT%2064-05W%20E6327/BAT%2064-05W%20E6327-ND/2080553, ComponentLink2Description=Datasheet, ComponentLink2URL=http://www.infineon.com/dgdl/bat64series.pdf?folderId=db3a30431400ef68011425f1ca2505e3&amp;fileId=db3a304314dca3890115191757980ead, Created_Date=2/16/2012, High_Price=0.05454, ID=8, Low_Price=0.05454, Misfit Price=0, Price=0.05454, Size="SC-70, SOT-323", Size_Imperial="SC-70, SOT-323", Size_Metric="SC-70, SOT-323", Vendor=Digikey, Vendor_Packaging="Tape & Reel (TR)", Vendor_Part_Number="BAT 64-05W H6327-ND", Vendor_Part_URL="http://search.digikey.com/scripts/DkSearch/dksus.dll?Detail&name=BAT 64-05W H6327-ND", Vendor_Qty_Avail=0, Vendor_Update_Date=4/26/2012, Watts=0, Watts_Str=0W
D2: library part DIODE-SCHOTTKY, "Diode, XXA, XXV, Schottky SMA", Manufacturer="Diodes Inc", Manufacturer Part Number=?, Sch-Display="40V, 1A", Vendor=Digi-Key, Vendor Part Number=?
D3 D4: library part DIODE-BAT54C-7-F, "Diode, 200mA, 30V, Schottky Common Cathode, SOT-23", Manufacturer="Diodes Inc", Manufacturer Part Number=BAT54C-7-F, Vendor Part Number=BAT54C-FDICT-ND, Sch-Display=BAT54C-7-F, Vendor=Digi-Key
D5 D6: library part LED-Red, "LED, Red, 12.7mcd, 20mA, 1.7V, 1206", Manufacturer="Stanley Electric Sales of America", Manufacturer Part Number=BR1111R-TR, Temperature Range="-30 ~ 85", Vendor Part Number=404-1054-1-ND, Sch-Display=BR1111R-TR, Vendor=Digi-Key
  D5: Sch-Display2=1.8V
F1: "Fuse, SRF, ?A, ?VDC", Sch-Display=2A, Vendor=Digi-Key
FB1 FB2: "Inductor, XXuH, XXA, XXXOhm, XX%", Manufacturer=Laird, Manufacturer Part Number=MI0603J601R-10, Vendor Part Number=?, Sch-Display="Ferrite, 0603", Vendor=?
j1 j6: library part altiumdb50250c9a771e29.42661008, Current_Str=A, Manufacture_Parts=none:4_pin_100mils, Manufacturer=none, Voltage=0, Voltage_Str=0V, Company_Part_GUID=altiumdb50250c9a771e29.42661008, Component=4_pin_100mils, ComponentLink1Description=unknown, ComponentLink2Description=Datasheet, ID=26, Manufacturer_Part_Number=4_pin_100mils, Misfit Price=0, Price=0, Vendor=unknown, Watts=0, Watts_Str=0W
J3: "CON, Pol-Lock Male, 2, Tin, 2.5mm", Manufacturer="Molex/Waldom Electronics Corp", Temperature Range="-25 ~ 85C", Sch-Display=2.5mm, Sch-Display2="3A 250V", Vendor=Digi-Key
J4: "Header, 3-Pin", LatestRevisionDate=17-Jul-2002, LatestRevisionNote="Re-released for DXP Platform.", Publisher="Altium Limited"
J8: "CON, Pol-Lock Male, 5, Tin, 2.5mm", Manufacturer="Molex/Waldom Electronics Corp", Sch-Display=2.5mm, Vendor=Digi-Key
L1: library part Ind1, "Inductor, 4.7uH, 3.1A, 38mOhm, 30%", Manufacturer="Taiyo Yuden", Manufacturer Part Number=NR5040T4R7N, Vendor Part Number=?, Sch-Display="4.7uH, 3.1A", Vendor=?
LED1: library part altiumdb4f59f5b2e3b411.05953718, "LED SUPER RED CLEAR 0603 SMD 20mA Vf=2V", Current_Str=A, Manufacture_Parts="Lite-On Inc:LTST-C190KRKT", Manufacturer="Lite-On Inc", Voltage=0, Voltage_Str=0V, Company_Part_GUID=altiumdb4f59f5b2e3b411.05953718, Component=LTST-C190KRKT, ComponentLink1Description=Digikey, ComponentLink1URL=http://search.digikey.com/us/en/products/LTST-C190KRKT/160-1436-1-ND/386816, ComponentLink2Description=Datasheet, ComponentLink2URL=http://optoelectronics.liteon.com/en-us/api/DwonloadFileHandler.ashx?txtSpecNo=DS-22-99-0151&amp;txtPartNo=LTST-C190KRKT, Created_Date=3/9/2012, High_Price=0.054, ID=19, Low_Price=0.033, Manufacturer_Part_Number=LTST-C190KRKT, Misfit Price=0, Price=0.033, Size="0603 (1608 Metric)", Size_Imperial=0603, Size_Metric=1608, Vendor=Digikey, Vendor_Packaging="Cut Tape (CT)", Vendor_Part_GUID=altiumdb4f59f5957738d6.49476478, Vendor_Part_Number=160-1436-1-ND, Vendor_Part_URL=http://search.digikey.com/us/en/products/LTST-C190KRKT/160-1436-1-ND/386816, Vendor_Qty_Avail=25660, Vendor_Unit_Price=0.41, Vendor_Update_Date=4/26/2012, Watts=0, Watts_Str=0W
LED2: library part altiumdb52dbc15523a908.74373465, "LED YELLOW CLEAR 0603 SMD", Current_Str=A, Manufacture_Parts="Lite-On Inc:LTST-C190KSKT", Manufacturer="Lite-On Inc", Voltage=0, Voltage_Str=0V, Company_Part_GUID=altiumdb52dbc15523a908.74373465, Component=LTST-C190KSKT, ComponentLink1Description=Digikey, ComponentLink1URL=http://www.digikey.com/product-detail/en/LTST-C190KSKT/160-1437-6-ND/1888653, ComponentLink2Description=Datasheet, ComponentLink2URL=http://optoelectronics.liteon.com/upload/download/DS-22-99-0189/P_100_LTST-C190KSKT.pdf, Created_Date=1/19/2014, High_Price=0.32, ID=27, Low_Price=0.0585, Manufacturer_Part_Number=LTST-C190KSKT, Misfit Price=0, Price=0.0585, Size="0603 (1608 Metric)", Size_Imperial=0603, Size_Metric=1608, Vendor=Digikey, Vendor_Part_Number=160-1437-6-ND, Vendor_Part_URL=http://www.digikey.com/product-detail/en/LTST-C190KSKT/160-1437-6-ND/1888653, Vendor_Update_Date=1/19/2014, Watts=0, Watts_Str=0W
MOD1: "Header, 4-Pin", LatestRevisionDate=17-Jul-2002, LatestRevisionNote="Re-released for DXP Platform.", Publisher="Altium Limited"
Q2: library part altiumdb4f097f24c87689.72269489, "MOSFET P-CH 12V 4.3A SOT-23", Current_Str=A, Manufacture_Parts="International Rectifier:IRLML6401TRPBF", Manufacturer="International Rectifier", Misfit Part Number=00013-209-00061, Old Part Number=5805-0112-00, Voltage=0, Voltage_Str=0V, Company_Part_GUID=altiumdb4f097f24c87689.72269489, Component=IRLML6401TRPBF, ComponentLink1Description=Datasheet, ComponentLink1URL=http://www.irf.com/product-info/datasheets/data/irlml6401pbf.pdf, ComponentLink2Description=Digikey, ComponentLink2URL=http://search.digikey.com/us/en/products/IRLML6401TRPBF/IRLML6401PBFTR-ND/811442, Created_Date=12/14/2011, High_Price=0.124, ID=2, Low_Price=0.102, Manufacturer_Part_Number=IRLML6401TRPBF, Misfit Price=0.0781, Price=0.0781, Size="TO-236-3, SC-59, SOT-23-3", Size_Imperial="TO-236-3, SC-59, SOT-23-3", Size_Metric="TO-236-3, SC-59, SOT-23-3", Vendor=Digikey, Vendor_Packaging="Cut Tape (CT)", Vendor_Part_GUID=altiumdb4ee8de13578bb8.73899850, Vendor_Part_Number=IRLML6401PBFTR-ND, Vendor_Part_URL=http://search.digikey.com/us/en/products/IRLML6401TRPBF/IRLML6401PBFTR-ND/811442, Vendor_Qty_Avail=54000, Vendor_Unit_Price=0.58, Vendor_Update_Date=1/8/2012, Watts=0, Watts_Str=0W
Q5: "TRANS, BJT,NPN, ,XXA,XXV,SOT-23", Manufacturer=?, Manufacturer Part Number=?, Sch-Display=?, Vendor=Digi-Key, Vendor Part Number=?
R1 R9 R14 R15: "RES, XXX, 1/10W, 1%, Thick Film, XXXX", Manufacturer=?, Manufacturer Part Number=?, Vendor=Digi-Key, Vendor Part Number=?
  R1: Sch-Display=10
  R9 R15: Sch-Display=10k
  R14: Sch-Display=1k
R2 R3 R18 R19 R20 R21 R22 R23 R24: "RES, XXX, 1/10W, 1%, Thick Film, XXXX", Manufacturer=Generic, Manufacturer Part Number="1%, 1/10W", Vendor Part Number=?, Vendor=Digi-Key
  R2 R21: Sch-Display=10k
  R3: Sch-Display=100
  R18: Sch-Display=49.9k
  R19: Sch-Display=15.8k
  R20: Sch-Display=100k
  R22 R23 R24: Sch-Display=4k7
R4: library part altiumdb4ee8dc965f2f62.61392404, "RES 0603 TKF 330R 5% 1/10W", Current_Str=A, Manufacture_Parts="Vishay/Dale:CRCW0603330RJNEA / Yageo:RC0603JR-07330RL", Manufacturer=Yageo, Manufacturer_Part_Number=RC0603JR-07330RL, Misfit Part Number=00015-126-33036, Tolerance=5%, Voltage_Str=5.74V, Working_Voltage=5.74, Company_Part_GUID=altiumdb4ee8dc965f2f62.61392404, Component=CRCW0603330RJNEA, ComponentLink1Description=Digikey, ComponentLink1URL=http://search.digikey.com/us/en/products/RC0603JR-07330RL/311-330GRCT-ND/729716, ComponentLink2Description=Datasheet, ComponentLink2URL=http://www.vishay.com/doc?20035, Created_Date=12/14/2011, High_Price=0.004, ID=29, Low_Price=0.002, Misfit Price=0, Ohms=330, Price=0.002, Size="0603 (1608 Metric)", Size_Imperial=0603, Size_Metric=1608, Vendor=Digikey, Vendor_Packaging="Cut Tape (CT)", Vendor_Part_GUID=altiumdb4ee8dc97ccbc41.78686305, Vendor_Part_Number=311-330GRCT-ND, Vendor_Part_URL=http://search.digikey.com/us/en/products/RC0603JR-07330RL/311-330GRCT-ND/729716, Vendor_Qty_Avail=169910, Vendor_Unit_Price=0.01, Vendor_Update_Date=4/26/2012, Watts=0.1, Watts_Str=0.1W
R5: library part altiumdb4ee8dc331cbc98.19926137, "RES 0603 TKF 10K 5% 1/10W", Current_Str=A, Manufacture_Parts="Vishay/Dale:CRCW060310K0JNEA / Yageo:RC0603JR-0710KL", Manufacturer=Yageo, Manufacturer_Part_Number=RC0603JR-0710KL, Old Part Number=4530-0107-00, Tolerance=5%, Voltage_Str=31.62V, Working_Voltage=31.62, Company_Part_GUID=altiumdb4ee8dc331cbc98.19926137, Component=CRCW060310K0JNEA, ComponentLink1Description=Digikey, ComponentLink1URL=http://search.digikey.com/us/en/products/RC0603JR-0710KL/311-10KGRCT-ND/729647, ComponentLink2Description=Datasheet, ComponentLink2URL=http://www.vishay.com/doc?20035, Created_Date=12/14/2011, High_Price=0.004, ID=11, Low_Price=0.002, Misfit Price=0, Ohms=10000, Price=0.002, Size="0603 (1608 Metric)", Size_Imperial=0603, Size_Metric=1608, Vendor=Digikey, Vendor_Packaging="Cut Tape (CT)", Vendor_Part_GUID=altiumdb4ee8dc350734c7.82805431, Vendor_Part_Number=311-10KGRCT-ND, Vendor_Part_URL=http://search.digikey.com/us/en/products/RC0603JR-0710KL/311-10KGRCT-ND/729647, Vendor_Qty_Avail=2009247, Vendor_Unit_Price=0.01, Vendor_Update_Date=4/26/2012, Watts=0.1, Watts_Str=0.1W
R6: library part altiumdb4ee8dcacc79f57.47125618, "RES 0603 TKF 5.1K 1% 1/10W", Current_Str=A, Manufacture_Parts="Yageo:RC0603FR-075K1L / Vishay/Dale:CRCW06035K10FKEA / KOA :RK73H1JTTD5101F", Manufacturer=Vishay/Dale, Manufacturer_Part_Number=CRCW06035K10FKEA, Misfit Part Number=00015-124-51045, Tolerance=1%, Voltage_Str=22.58V, Working_Voltage=22.58, Company_Part_GUID=altiumdb4ee8dcacc79f57.47125618, Component=RC0603FR-075K1L, ComponentLink1Description=Digikey, ComponentLink1URL=http://search.digikey.com/us/en/products/CRCW06035K10FKEA/541-5.10KHTR-ND/1174748, ComponentLink2Description=Datasheet, ComponentLink2URL=http://www.yageo.com/documents/recent/PYu-RC0603_51_RoHS_L_4.pdf, Created_Date=12/14/2011, High_Price=0.00171, ID=35, Low_Price=0.00117, Misfit Price=0, Ohms=5100, Price=0.00117, Size="0603 (1608 Metric)", Size_Imperial=0603, Size_Metric=1608, Vendor=Digikey, Vendor_Packaging="Cut Tape (CT)", Vendor_Part_GUID=altiumdb4ee8dcae84b624.09417177, Vendor_Part_Number=541-5.10KHTR-ND, Vendor_Part_URL=http://search.digikey.com/us/en/products/CRCW06035K10FKEA/541-5.10KHTR-ND/1174748, Vendor_Qty_Avail=10000, Vendor_Unit_Price=0.014, Vendor_Update_Date=4/26/2012, Watts=0.1, Watts_Str=0.1W
R7 R8 R12 R13: library part altiumdb4ee8dc53e1b436.35151719, "RES 0603 TKF 1K 1% 1/10W", Current_Str=A, Manufacture_Parts="Yageo:RC0603FR-071KL / Vishay/Dale:CRCW06031K00FKEAHP / KOA :RK73H1JTTD1001F", Manufacturer=Vishay/Dale, Manufacturer_Part_Number=CRCW06031K00FKEAHP, Misfit Part Number=00015-124-10045, Tolerance=1%, Voltage_Str=10.00V, Working_Voltage=10.00, Company_Part_GUID=altiumdb4ee8dc53e1b436.35151719, Component=RC0603FR-071KL, ComponentLink1Description=Digikey, ComponentLink1URL=http://search.digikey.com/us/en/products/CRCW06031K00FKEAHP/541-1.00KSTR-ND/2222249, ComponentLink2Description=Datasheet, ComponentLink2URL=http://www.yageo.com/documents/recent/PYu-RC0603_51_RoHS_L_4.pdf, Created_Date=12/14/2011, High_Price=0.00171, ID=18, Low_Price=0.00117, Misfit Price=0, Ohms=1000, Price=0.00117, Size="0603 (1608 Metric)", Size_Imperial=0603, Size_Metric=1608, Vendor=Digikey, Vendor_Packaging="Cut Tape (CT)", Vendor_Part_GUID=altiumdb4ee8dc558c3e14.38282699, Vendor_Part_Number=541-1.00KSTR-ND, Vendor_Part_URL=http://search.digikey.com/us/en/products/CRCW06031K00FKEAHP/541-1.00KSTR-ND/2222249, Vendor_Qty_Avail=5000, Vendor_Unit_Price=0.014, Vendor_Update_Date=4/26/2012, Watts=0.1, Watts_Str=0.1W
R10 R11: library part altiumdb52db39dc769f41.69333525, "RES 0.2 OHM 0.25W 1% 1206 SMD", Current_Str=A, Manufacture_Parts=Yageo:PT1206FR-070R2L, Manufacturer=Yageo, Manufacturer_Part_Number=PT1206FR-070R2L, Temp_Coeff=75ppm/C, Tolerance=1%, Voltage=0, Voltage_Str=0.22V, Working_Voltage=0.22, Company_Part_GUID=altiumdb52db39dc769f41.69333525, Component=PT1206FR-070R2L, ComponentLink1Description=Digikey, ComponentLink1URL=http://www.digikey.com/product-detail/en/PT1206FR-070R2L/311-0.2ANDKR-ND/2178407, ComponentLink2Description=Datasheet, ComponentLink2URL=http://www.yageo.com/documents/recent/PYu-PT_521_RoHS_L_1.pdf, Created_Date=1/18/2014, High_Price=0.45, ID=18, Low_Price=0.07447, Misfit Price=0, Ohms=0.2, Price=0.07447, Size="1206 (3216 Metric)", Size_Imperial=1206, Size_Metric=3216, Vendor=Digikey, Vendor_Part_Number=311-0.2ANDKR-ND, Vendor_Part_URL=http://www.digikey.com/product-detail/en/PT1206FR-070R2L/311-0.2ANDKR-ND/2178407, Vendor_Update_Date=1/18/2014, Watts=0.25, Watts_Str=0.25W, Working_Current=0
R16: "Therm, NTC, XXk, 1/10W, 1%, XXXX", Manufacturer=?, Manufacturer Part Number=?, Sch-Display=10k, Vendor=Digi-Key, Vendor Part Number=?
SW1 SW2 SW3 SW5: "Switch, PB, SPST-NO, 4-pin, small white", Manufacturer Part #=K2-1808SN-A4SW-01, Force="90, 180, 250g", Sch-Display=4x3x2.5mm, Vendor=LCSC
TVS1: library part TVS_UNI, "TVS, ?V, ?W, Unidirectional", Manufacturer Part Number="SMAJ24A-13-F,  F6827CT-ND", Vendor Part Number=?, Sch-Display="23V, 400W", Vendor=Digi-Key
U1: library part altiumdb57cf0e2bc99638.36445338, Current_Str=A, Manufacture_Parts=:A4954, Voltage=0, Voltage_Str=0V, Company_Part_GUID=altiumdb57cf0e2bc99638.36445338, Component=A4954, ComponentLink1Description=unknown, ComponentLink2Description=Datasheet, ID=39, Manufacturer_Part_Number=A4954, Misfit Price=0, Price=0, Vendor=unknown, Watts=0, Watts_Str=0W
U2: library part IC-MCP1700T-5002E, "IC, Reg LDO, 250mA, 3.3V, SOT23", Manufacturer=Microchip, Manufacturer Part Number=MCP1700T-3302E/TT, Sch-Display=MCP1700T, Sch-Display2="3.3V, 0.25A, 6V", Vendor=Digi-Key
U3: "IC, Buck regulator, 3-26V, 1.2A, 1.5MHz", Manufacturer="Alpha and Omega", Manufacturer Part Number=AOZ1280CI, Sch-Display="DC/DC buck regulator", Sch-Display2="or AOZ1282 (36V)"
U6: library part altiumdb5786b44c08eb91.84503477, Current_Str=A, Manufacture_Parts=:AS5047D, Voltage=0, Voltage_Str=0V, Company_Part_GUID=altiumdb5786b44c08eb91.84503477, Component=AS5047D, ComponentLink1Description=unknown, ComponentLink2Description=Datasheet, ID=37, Manufacturer_Part_Number=AS5047D, Misfit Price=0, Price=0, Vendor=unknown, Watts=0, Watts_Str=0W
U7: library part altiumdb506c612ca2ae40.60197528, "TVS Diode Arrays ESD Protection Low Cap", Current_Str=A, Manufacture_Parts=STMicroelectronics:USBLC6-2SC6, Manufacturer=STMicroelectronics, Manufacturer_Part_Number=USBLC6-2SC6, Voltage=0, Voltage_Str=0V, Company_Part_GUID=altiumdb506c612ca2ae40.60197528, Component=USBLC6-2SC6, ComponentLink1Description=Mouser, ComponentLink1URL=http://www.mouser.com/Search/Refine.aspx?N=4294764375&amp;Keyword=511-USBLC6-2SC6, ComponentLink2Description=Datasheet, ComponentLink2URL=http://www.st.com/internet/com/TECHNICAL_RESOURCES/TECHNICAL_LITERATURE/DATASHEET/CD00050750.pdf, Created_Date=10/3/2012, High_Price=0.67, ID=9, Low_Price=0.321, Misfit Price=0, Price=0.321, Size=SOT-23-6, Size_Imperial=SOT-23-6, Size_Metric=SOT-23-6, Vendor=Mouser, Vendor_Part_Number=511-USBLC6-2SC6, Vendor_Part_URL=http://www.mouser.com/Search/Refine.aspx?N=4294764375&Keyword=511-USBLC6-2SC6, Vendor_Qty_Avail=50249, Vendor_Update_Date=10/3/2012, Watts=0, Watts_Str=0W
U8: library part altiumdb5720cf6a19f4d8.76560122, Company_Part_GUID=altiumdb5720cf6a19f4d8.76560122
USB1: library part altiumdb561d4bc7e25b70.41497989, "Connector Receptacle USB - micro B 2.0 5 Position Surface Mount, Right Angle, Horizontal", Current_Str=A, Manufacture_Parts=FCI:10118194-0001LF, Manufacturer=FCI, Voltage=0, Voltage_Str=0V, Company_Part_GUID=altiumdb561d4bc7e25b70.41497989, Component=10118194-0001LF, ComponentLink1Description=Digikey, ComponentLink1URL=http://www.digikey.com/product-detail/en/10118194-0001LF/609-4618-6-ND/2785383, ComponentLink2Description=Datasheet, ComponentLink2URL=http://portal.fciconnect.com/Comergent//fci/drawing/10118194.pdf, Created_Date=10/13/2015, High_Price=0.46, ID=45, Low_Price=0.14625, Manufacturer_Part_Number=10118194-0001LF, Misfit Price=0, Price=0.14625, Vendor=Digikey, Vendor_Part_Number=609-4618-6-ND, Vendor_Part_URL=http://www.digikey.com/product-detail/en/10118194-0001LF/609-4618-6-ND/2785383, Vendor_Update_Date=10/13/2015, Watts=0, Watts_Str=0W
X1: library part XTAL-32.768kHz, "OSC, XTAL, 32.768kHz", Manufacturer=Abracon, Manufacturer Part Number=AB26TRQ-32.768KHZ-T, Sch-Display=32.768kHz, Vendor=Digi-Key

## Free pads (board coordinates)
  round 180 hole 137.8: 0(0,0) 0(0,1220.47) 0(1220.47,0) 0(1220.47,1220.47)
  round 44 hole 32: 0(30,275) 0(125,175) 0(125,275) 0(225,175) 0(225,275)
  round 70 hole 45: 4(815,1365)
  rect 60x75 hole 45: 5(935,1365)

## Via types
v1: diameter 23.62, hole 11.81, Top Layer to Bottom Layer, tented both sides, 130 vias
v2: diameter 24, hole 12, Top Layer to Bottom Layer, tented both sides, 9 vias
v3: diameter 26, hole 14, Top Layer to Bottom Layer, tented both sides, 3 vias
v4: diameter 40, hole 20, Top Layer to Bottom Layer, tented both sides, 2 vias
v5: diameter 32, hole 20, Top Layer to Bottom Layer, 1 vias

## Nets (pads, with @x,y where several pads share a name; then routed paths per layer and width w, separated by ;. In a path a pad name is that pad's centre, name@x,y a point inside that pad or via, vN(x,y) a via of type N, cw(c..) or ccw(c..) an arc to the next point about the centre after c; other vN are vias at no path point)
3V3: C4.1 C5.1 C6.1 C7.1 C8.1 C9.1 C24.2 D1.3 D3.3 D4.3 D5.A FB1.2 FB2.2 j1.2 L1.2 pad.0@125,275 Q2.2 R8.2 R15.2 R18.1 U8.17 U8.36 U8.44 | length 5985.4
  Top Layer w6: 332.01,230 U8.36 ; v1@389.76,30 U8.44 ; R15.2 640.4,481 695,426.4 695,375 657,337 657,322 v1(655,320) 655,295.24 U8.17 U8.17@631.64,271.64 ; R18.1 1410,410 1410,273 C24.2
  Top Layer w8: v1(280,230) 332.01,230
  Top Layer w15: j1.2 610,1005 625,990 625,891 FB2.2 v1(700,860) 855,860 1000,715 v1(1000,695) ; v1@999.5,694.5 1025,669 v1(1025,570) ; v1(1230,210) L1.2@1265.91,210 ; v1(1230,255) L1.2@1273.82,255 ; v1@1230,298.82 v1(1230,300) L1.2@1295,300
  Top Layer w20: L1.2@1293.91,238 C24.2
  Bottom Layer w6: R8.2@-173,-71 -181.57,-62.43 -181.57,48.43 -155,75 -155,144.7 ; D1.3 164.37,570.63 195,540 310.39,540 C8.1
  Bottom Layer w7: -155,144.7 -155,150 -62,243 93,243 pad.0@125,275 ; j1.2 C9.1@610,1129.61
  Bottom Layer w8: pad.0@125,275 170,230 v1(280,230) ; 577.56,814 577.56,816.2 578.66,817.31 578.66,824.89 585.52,831.75 600.75,831.75 601,832
  Bottom Layer w10: 468,765 516,813 568.19,813 569.19,814 577.56,814 ; 601,832 601,834 630,863 697,863 v1(700,860)
  Bottom Layer w12: v1(280,230) 300,210 C7.1 345.4,235.4 391,281 545,281 ; v1(380,30) 410,30 C4.1 450.2,45 469.57,45 545,120.43 545,281 ; Q2.2 387.6,743.31 409.29,765 468,765 ; C6.1@623.8,281 545,281 ; v1(655,320) 655,305 C6.1 667.6,277.4 775,170 775,120 775,106 FB1.2
  Bottom Layer w15: C8.1 350.39,635.39 364.57,649.57 Q2.2 ; 775,120 1010,120 1035,145 1205,145 1230,170 v1(1230,210) v1(1230,255) v1(1230,300) 1230,395 1307.5,472.5 ; v1(1000,695) D3.3@1000,733 ; D3.3 D4.3 ; v1(1025,570) 1210,570 1307.5,472.5 ; v1@1235.39,294.61 C5.1 ; D5.A 1385,550 1307.5,472.5
\ERROR_OUT: J8.5 R3.2 | length 73.8
  Bottom Layer w6: J8.5 1306,1004.7 R3.2
\RESET: pad.0@30,275 SW5.1 SW5.2 U8.40 | length 700.8
  Top Layer w6: 49.44,180.56 49.44,155.56 146.31,58.69 146.31,-6.31 170,-30 290,-30 305,-15 305,70 338.5,103.5 351.9,103.5 U8.40
  Top Layer w7: pad.0@30,275 30,200 49.44,180.56
A0: SW3.1 SW3.2 U8.3 | length 354.5
  Top Layer w6: SW3.1@513.58,-115 SW3.2@675,-115 ; U8.3 597.68,20 v1(600,20) v1@600,15 ; 600,-115 v1(600,-65)
  Bottom Layer w6: v1(600,-65) v1(600,20)
A1: SW2.1 SW2.2 U8.7 | length 611.7
  Top Layer w6: U8.7 649.04,80 680,80 693,93 987,93 1025,55 SW2.2@1025,-115
A2: U6.1 U8.8 | length 854.2
  Top Layer w6: U8.8 651.88,105 916.97,105 939.51,127.54 939.51,247.46 897,289.97 897,348.85 770,475.85 v1(770,500)
  Bottom Layer w6: U6.1 764.33,494.33 v1(770,500)
A3: C1.2 R9.1 R14.2 U8.9 | length 929.9
  Top Layer w6: U8.9 667.72,117 912,117 927.51,132.51 927.51,242.49 885,285 885,343.88 749.19,479.69 749.19,509.19 767.51,527.51 772.49,527.51 788.27,511.73 796.27,511.73 C1.2
  Top Layer w7: C1.2 812,500 R9.1
A4: U1.6 U8.10 | length 1317
  Top Layer w6: U1.6 438.61,1036.39 450,1025 450,1017 520,947 520,906.25 529.74,896.5 529.74,884.28 531,883.03 531,880.43 519,868.43 519,578.69 563.69,534 643.97,534 780,397.97 780,355 730,305 v1(730,290) ; U8.10@661.95,153.32 U8.10 682.56,130 775,130 780,135 780,210 v1(785,215)
  Bottom Layer w6: v1(730,290) 730,270 v1(785,215)
A5: SW1.1 SW1.2 U8.47 | length 235.1
  Top Layer w6: SW1.2@330,-115 SW1.2@345,-115 ; SW1.2@345,-120 SW1.2@345,-115 ; U8.47 345,-98.27 SW1.2@345,-115
AREF: C19.1 C20.1 U8.4 | length 182.2
  Top Layer w6: U8.4 604.52,41 639,41 640,40 v1(640,35)
  Bottom Layer w6: C19.1 C20.1 645,35 v1(640,35)
CHA: pad.0@1220.47,1220.47 R1.2 | length 151.8
  Bottom Layer w50: R1.2 1220.47,1364.53 pad.0@1220.47,1220.47
D0: D3.2 R22.2 U8.16 | length 738.6
  Top Layer w6: U8.16 682.56,294.96 682.56,320.67 694,332.11 v1(694,333)
  Bottom Layer w6: v1(694,333) 705.56,344.56 726.44,344.56 739.81,331.19 772.59,331.19 802.56,361.16 802.56,391.56 1065,654 1065,681 D3.2 R22.2@1140,701
D1: D3.1 R23.2 U8.15 | length 851.3
  Top Layer w6: U8.15@660.47,243.8 U8.15 695,279.56 695,303.94 715.12,324.06 715.12,370 v1@710,370
  Bottom Layer w6: v1(717,373) 746.81,343.19 767.62,343.19 790,365.57 790,385 790.56,385.56 790.56,396.53 1050,655.97 1050,706.83 1085,741.83 D3.1 1110,800 R23.2
D2: R15.1 R16.2 U8.23 | length 624.9
  Top Layer w6: v3@513,896 504.19,887.19 504.19,530.81 521,514 531,514 R15.1@555,490 ; U8.23 575,382.27 575,409.49 571.49,413 568,413 546,435 546,463 R15.1 R15.1@555,490 ; R15.1@572,490 R15.1@555,490
  other v3: 507,888
D3: R21.1 U8.14 | length 919.7
  Top Layer w6: U8.14 709,265.73 709,300.97 742,333.97 742,351.57 738.19,355.38 738.19,372.62 742,376.43 v1(742,389)
  Bottom Layer w6: v1(742,389) 745.37,392.37 755.37,392.37 766.56,403.56 766.56,406.47 1025,664.91 1025,716.28 1035,726.28 1035,920 R21.1
D4: R7.1 U8.13 | length 127.6
  Top Layer w6: U8.13 706.11,235 725,235 780,290 R7.1@780,295
D5: U1.3 U8.24 | length 797.1
  Top Layer w6: U1.3 440.38,959.62 460.81,939.19 460.81,872.38 461,872.19 461,843.81 460.81,843.62 460.81,532.81 440,512 v1@440,485 ; v1@470,420 470,431.28 498.72,460 520,460 534,446 534,430 560,404 560,395.11 U8.24
  Bottom Layer w6: v1(435,485) 474,446 474,426 v1(475,425)
D6: U1.4 U8.29 | length 790.4
  Top Layer w6: v1(375,400) 375,413 426.28,464.28 426.38,464.19 443.62,464.19 455.81,476.38 455.81,498.78 473,515.97 473,952 439.79,985.21 U1.4 ; v1(410,360) 410,346.88 U8.29
  Bottom Layer w6: v1@380,390 v1(410,360)
D7: U1.5 U8.30 | length 829.9
  Top Layer w6: U1.5 439.2,1010.8 485,965 485,511 467.81,493.81 467.81,471.41 448.97,452.57 448.97,452 396,399.03 396,391.3 388,383.3 388,374.54 391.55,370.99 389.19,368.62 389.19,351.38 393,347.57 393,346.18 389.19,342.36 389.19,339.85 U8.30
D8: LED2.K U8.11 | length 1314.3
  Top Layer w6: LED2.K -130,-125 -130,-150 -75,-205 70,-205 122.56,-152.44 407.56,-152.44 525,-35 685,-35 v1@690,-30 ; U8.11 695.39,145 740,145 v1(750,155)
  Bottom Layer w6: v1(690,-35) 675,-20 675,39.3 669,45.3 669,68.7 745,144.7 v1@745,145
D9: R12.1 U8.12 | length 199.7
  Top Layer w6: U8.12 708.23,160 725.57,160 750,184.43 750,225 791.21,266.21 R12.1
D10: D4.1 R24.2 U8.27 | length 1351.7
  Top Layer w6: U8.27 446.84,365.72 434.28,365.72 415,385 415,401.06 453.94,440 455,440 502,487 v3(502,493) ; v1@524,541 543,522 639,522 767,394 767,372 v1(759,364)
  Bottom Layer w6: v3(502,493) 501,494 501,529 510.28,538.28 522.28,538.28 v1(525,541) ; v1(759,364) 759,374 778.56,393.56 778.56,401.5 1037.56,660.5 1037.56,711.37 1055,728.8 1055,875 D4.1 R24.2@1139,905
D11: Q2.1 U8.25 | length 313.8
  Top Layer w6: U8.25 480,388.23 480,395 510,425 v1(510,435)
  Bottom Layer w6: Q2.1 462.4,474.6 494.56,442.44 v1@502.56,442.44
D12: U8.28 | length 37.3
  Top Layer w6: 431,353.72 U8.28
D13: LED1.A U8.26 | length 821.5
  Top Layer w6: LED1.A -108.2,112.75 -108.2,166.8 -95,180 -95,230 -5,320 v1(225,320) ; v1@445,395.39 U8.26
  Bottom Layer w6: v1(225,320) 400,320 440,360 v1(440,395)
D+: U7.3 USB1.3 | length 191
  Top Layer w7: USB1.3 15,490 53.48,451.52 53.48,426.52 61.4,418.6 U7.3
D-: U7.1 USB1.2 | length 155.9
  Top Layer w7: USB1.2 79.57,515.59 U7.1
DIR: J8.3 R23.1 | length 88.1
  Bottom Layer w10: R23.1 J8.3@1298.15,800
ENABLE: J8.4 R24.1 | length 89.7
  Bottom Layer w10: R24.1 J8.4@1299.72,900
GND: C1.1 C2.2 C3.2 C4.2 C5.2 C6.2 C7.2 C8.2 C9.2 C11.1 C12.2 C13.2 C14.1 C15.2 C17.2 C18.2 C19.2 C20.2 C21.2 C22.2 C23.2 C24.1 D2.A D6.K j1.1 J3.1 J4.1 J8.1 MOD1.2 pad.0@225,275 pad.5 Q5.2 R1.1 R5.1 R10.2 R11.2 R13.2 R14.1 R16.1 R19.2 SW1.3 SW1.4 SW2.3 SW2.4 SW3.3 SW3.4 SW5.3 SW5.4 TVS1.A U1.1 U1.8 U1.17 U2.1 U3.2 U6.5 U6.13 U7.2 U8.5 U8.18 U8.35 U8.42 USB1.5 USB1.6 X1.3 | length 2432.1
  Top Layer w6: USB1.6@-166.44,603.56 USB1.6@-163.44,603.56 ; USB1.6@-163.44,533.31 USB1.6@-163.11,533.31 ; USB1.6@-163.11,454.57 USB1.6@-148.44,454.57 ; USB1.6@-159.88,344.44 -159.88,372 USB1.6@-148.44,372 ; USB1.6@-147.36,627.8 USB1.6@-115.44,627.8 ; USB1.6@-134,605 -47.52,603.56 USB1.6@-37.13,603.39 ; R11.2@-62.12,1033.56 R11.2 ; R10.2@-41.12,807.56 R10.2 ; USB1.6@-38,376 -38,382.56 -37.13,383.43 USB1.6@-37.13,391.57 ; USB1.6@-37.13,588.43 -36.88,603.38 USB1.6@-37.13,603.39 ; USB1.6@-36.87,604.43 -36.87,603.56 -37.13,603.56 USB1.6@-37.13,603.39 ; R10.2@-30,832.12 R10.2 ; -20,1005 -55,1005 -62.12,1012.12 R11.2 ; v1(-20,1050) -40.12,1050 R11.2 ; v1(-1,789) -7,795 -25,795 -25,804.88 R10.2 ; v1(0,850) -20,850 -41.12,828.88 R10.2 ; v1(305,255) 334.85,255 359.97,229.88 U8.35@391.29,198.56 ; U8.42 U8.35@450,145 ; C21.2@484.43,1269.43 C21.2@493,1278 ; U8.35@494.56,220.56 U8.35@516.56,198.56 ; U8.5@580.56,90.56 U8.5@582.8,90.56 ; U8.5 U8.5@582.8,90.56 ; U8.18 530.48,198.56 U8.35@516.56,198.56 ; U8.35@516.56,198.56 516.56,156.8 U8.5@582.8,90.56
  Top Layer w7: v1(-185,240) -185,216.86 SW5.3 ; v1(810,175) 824.61,160.39 C22.2 C23.2
  Top Layer w10: USB1.5 1.18,438.82 v1(15,425) ; D2.A v1(1090,315) ; v1(1180,420) U3.2 1279,420 R19.2 ; v1(1300,355) 1350,355 C24.1
  Top Layer w12: v1(70,385) 140,385 150,395 150,440 134,456 U7.2
  Top Layer w30: C21.2 C21.2@484.43,1269.43
  Top Layer w39.37: v2(286,998) 290,994 290,915
  Top Layer w80: v2(286,998) v2(286,1041.31) 286,1086
  Bottom Layer w6: -155,40 -128.42,66.58 R13.2 ; v1(-150,0) -142.81,-7.19 -142.81,-121.45 -143,-121.63 -143,-134 -73.31,-203.69 1.31,-203.69 30,-175 ; C20.2 C19.2 ; C15.2 654.61,768.14 661.18,761.56 U6.13
  Bottom Layer w10: D6.K v1(1385,935)
  other v1: 435,-190 605,-182.99 955,-182.99 110,-115 780,-110 160,-50 310,-45 910,-30 495,-20 1075,105 1335,110 175,120 -75,130 520,140 440,205 590,205 515,305 1179,378 315,440 760,585 760,690 875,690 -70,705 0,705 261,714 260,777 210,785 330,810 0,820 310,840 355,840 275,875 310,875 355,875 945,875 335,899.06 -20,991 -20,1020 950,1050 265,1100 300,1100 335,1130 125,1135 275,1135 -120,1140 405,1140 285,1175 345,1180 405,1180 496,1190 925,1215 285,1220 345,1220 405,1220 757,1228 1385,1230 340,1270 -120,1305 1090,1320 1090,1345 40,1370 120,1370 195,1370
  other v2: 242.69,954.69 286,954.69 329.31,954.69 242.69,998 329.31,998 242.69,1041.31 329.31,1041.31
  other v4: 390,1310
MISO: U6.3 U8.21 | length 203.5
  Top Layer w6: U8.21 643.4,395 v1(635,395)
  Bottom Layer w6: v1@635.59,395 U6.3
MOSI: U6.4 U8.19 | length 297.4
  Top Layer w6: U8.19 645,340.92 645,350 681,386 681,423.43 657.43,447 613,447 v1@610,444
  Bottom Layer w6: v1@610,435 U6.4
  other v1: 614,444
NetC3_1: C3.1 D1.1 U2.2 | length 235.4
  Bottom Layer w10: D1.1 170,675 185,675 199,661 U2.2 C3.1@255,580
NetC11_2: C11.2 FB1.1 U8.6 | length 264
  Top Layer w6: U8.6 641.2,60 v1@685,60
  Bottom Layer w6: v1(690,60) 690,30 705,15 C11.2 759,40 775,40 FB1.1
NetC14_2: C14.2 U8.43 | length 121.3
  Top Layer w6: v1(370,60) 391.92,60 U8.43
  Bottom Layer w6: v1(370,60) C14.2
NetC15_1: C15.1 Q2.3 U6.11 U6.12 | length 358.2
  Bottom Layer w6: Q2.3 445.43,720.43 524,799 599.39,799 C15.1 ; U6.11 610,785 ; C15.1@610,800.39 610,785 ; U6.12 635.59,759.41 610,785
NetC16_1: C16.1 D2.K L1.1 U3.6 | length 361.1
  Top Layer w10: D2.K 1050,240 1066.46,256.46 L1.1@1146.69,256.46 ; C16.1 U3.6 L1.1@1122.87,260.28
NetC16_2: C16.2 U3.1 | length 282.1
  Top Layer w8: C16.2 1020,350 1069.14,350 1071.14,348 v1(1099,348) ; v1(1149,349) 1222,349 1235,362 U3.1
  Bottom Layer w8: v1(1099,348) 1148,348 v1(1149,349)
NetC17_1: C17.1 U8.1 X1.1 | length 280.6
  Top Layer w6: U8.1 584.01,-22 612,-22 612.44,-22.44 667.56,-22.44 ; 660,-22.44 667.56,-22.44 ; C17.1@730.39,-55 X1.1@730.39,-14.61 ; X1.1@730.39,-4.61 X1.1@735,0 ; X1.1 680,-10 667.56,-22.44
NetC18_1: C18.1 U8.2 X1.2 | length 262.5
  Top Layer w6: U8.2 599.85,-10 645,-10 655,-10 690.43,25.43 X1.2 C18.1@735,64.61
NetC22_1: C22.1 R7.2 U1.2 | length 1048.9
  Top Layer w6: U1.2 440.98,934.02 448,927 448,883 v1@440,875 ; v1@535,861.97 531,857.97 531,585 570,546 648.94,546 808.79,386.15 R7.2 808.79,306.21 850,265 C22.1
  Bottom Layer w6: v1(440,881) 442.23,878.77 455.2,878.77 473.41,860.56 530.56,860.56 v1@540,870
  other v1: 540,860
NetC23_1: C23.1 R12.2 U1.7 | length 1149.4
  Top Layer w6: U1.7 436.98,1061.98 466,1032.96 466,1018.49 482.34,1002.15 ; 482.34,1002.13 489.62,994.85 489.62,994.38 536.47,947.53 536.47,906.74 541.74,901.47 541.74,889.26 561,870 561,847 543,829 543,589.97 574.97,558 653.91,558 860,351.91 860,315 R12.2 900,252.58 C23.1
NetD5_K: D5.K D6.A | length 130
  Bottom Layer w6: D5.K D6.A
NetF1_1: F1.1 J3.2 pad.4 | length 206.2
  Top Layer w40: F1.1 705,1290 J3.2
  Top Layer w50: J3.2 pad.4@825,1355
NetFB2_1: FB2.1 MOD1.1 | length 80
  Top Layer w6: FB2.1@575,860 MOD1.1
Netj6_1: j6.1 U1.10 | length 320.8
  Top Layer w16: 75,1085 85,1085 108.02,1061.98 142.3,1061.98